# EAGLE board NFC Shield V0.9b (EAGLE 5.10)
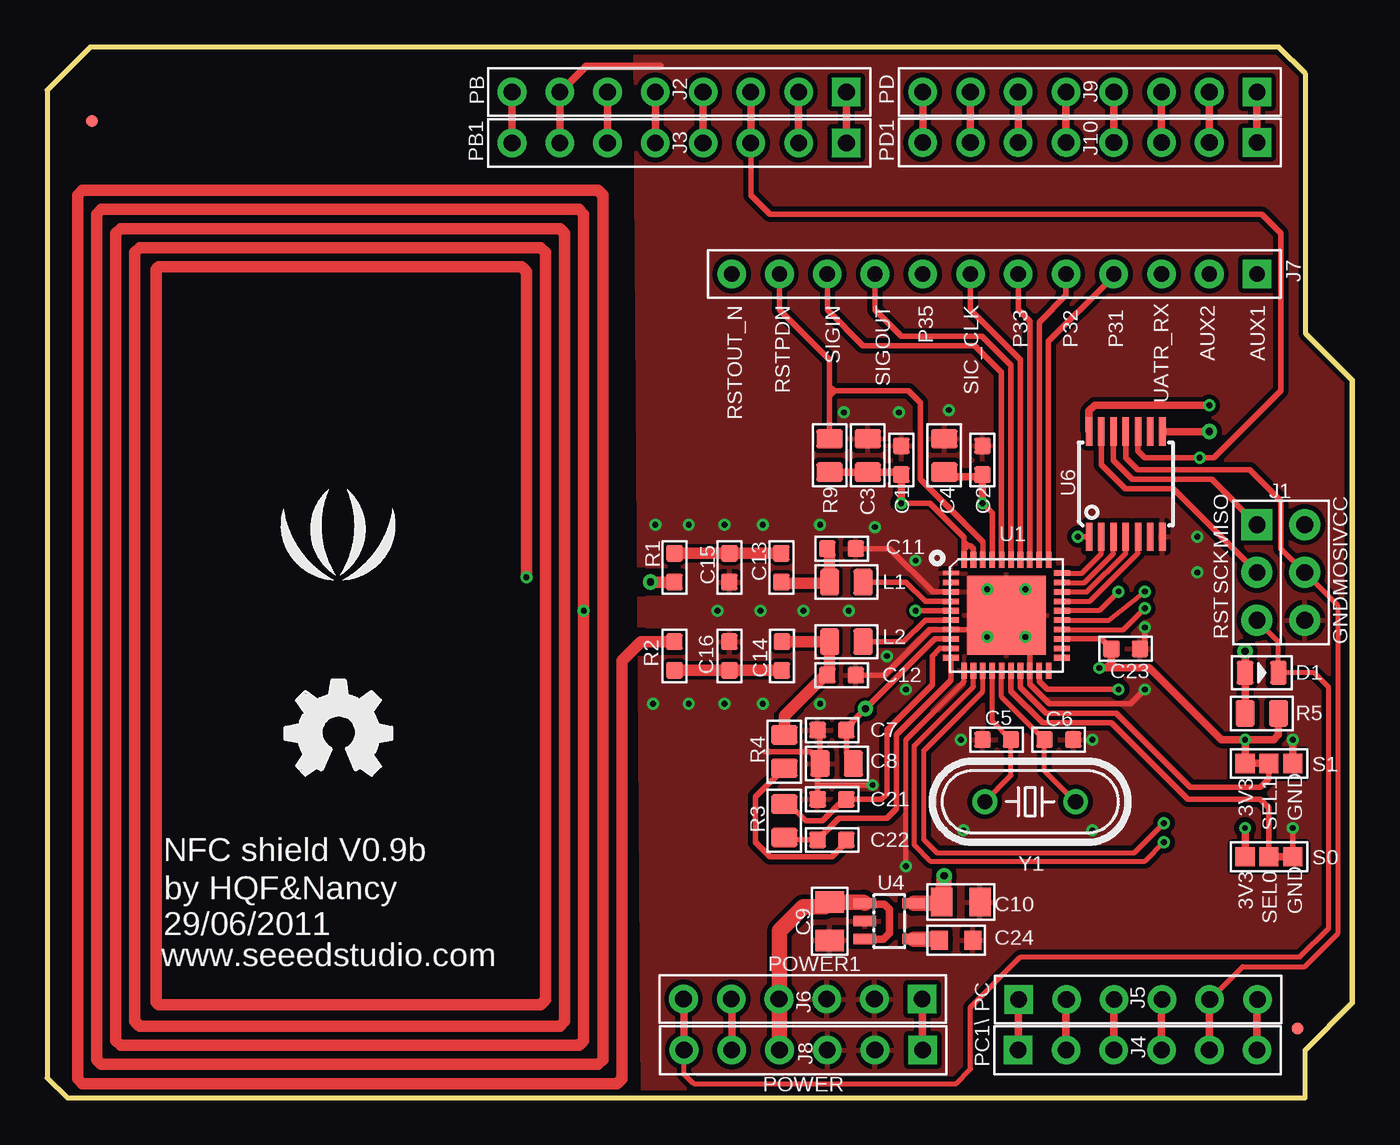
[diagram p0: board, top side]
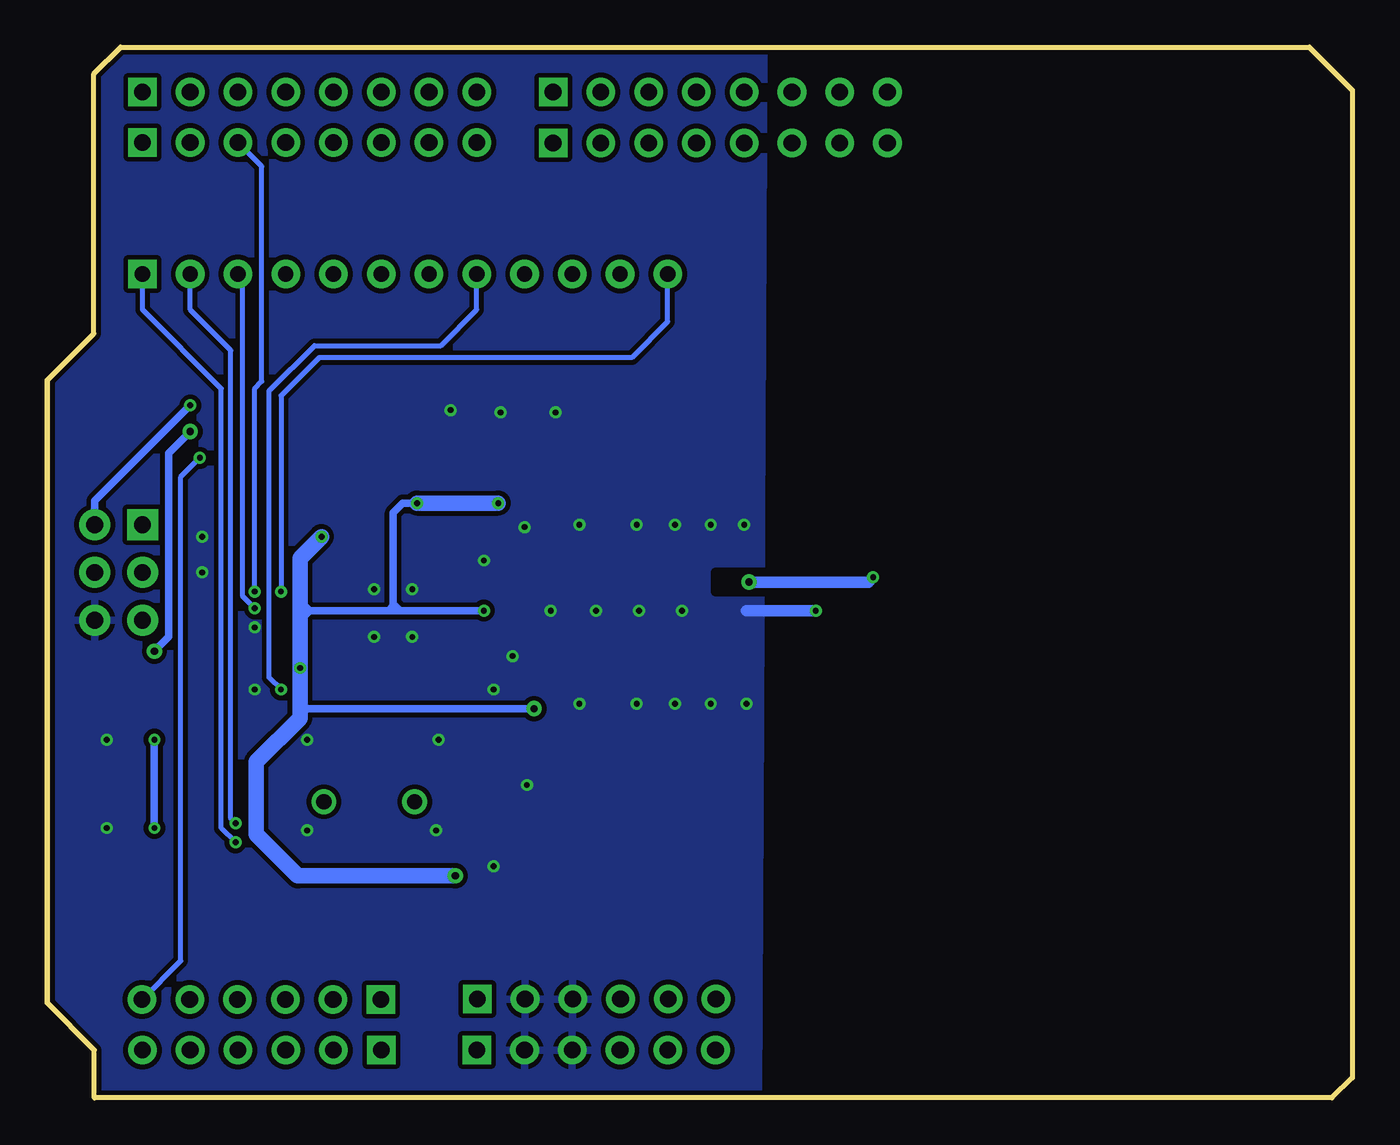
[diagram p1: board, bottom side, seen from below]

Size 69.44 x 55.88 mm. Coordinates in mm from the lower left corner, seen from the top.
Outline: 1.09,0 66.93,0 66.93,2.54 69.44,5.05 69.44,38.15 66.95,40.64 66.95,54.46 65.53,55.88 2.29,55.88 0,53.59 0,1.07 1.09,0
Copper layers (1*16): Top 0.035mm / dielectric 1.5mm / Bottom 0.035mm
Design rules "SeeedStudio_rule_no_angle_090911": minimum track width 6mil, minimum drill 12mil, track to track 6mil, track to pad 6mil, pad to pad 6mil, via to via 6mil, smd to smd 0mil, copper to edge 10mil, drill to drill 10mil, minimum pad ring 10mil, minimum via ring 6mil, stop-mask expansion 2mil, vias tented up to drill 100mil, thermal gap 10mil
Net classes: 0 default: width 0.152 mm, drill 0.305 mm, clearance 0.152 mm; 3 usbvcc: width 0.203 mm, drill 0.305 mm, clearance 0.203 mm
tRestrict: area 31.6,26.9 to 33.9,27.9; area 31.6,23.7 to 33.9,24.8; area 63,17.1 to 66.9,18.4; area 63,12.1 to 67,13.5
bRestrict: area 31.6,26.9 to 33.9,27.9

## Footprints (pad centres in the part's own frame; a part is rotated, then mirrored left to right if it is on the bottom)
0603 = smd 0.889 x 0.889: 1 -0.762,0; 2 0.762,0
0805 = smd 1.016 x 1.397: 1 -0.889,0; 2 0.889,0
0805' = smd 1.143 x 1.524: 1 -1.016,0; 2 1.016,0
0603' = smd 0.889 x 1.016: 1 -0.889,0; 2 0.889,0
D0805 = smd 0.889 x 1.27: + -0.889,0; - 0.889,0
2X3P-2.54-LEADED = drill 0.889 pad 1.651 square: 1 -1.27,2.54 | drill 0.889 pad 1.651 round: 2 -1.27,0; 3 -1.27,-2.54; 4 1.27,-2.54; 5 1.27,0; 6 1.27,2.54
CK_1X8 = drill 0.889 pad 1.524 square: 1 0,8.89 | drill 0.889 pad 1.524 round: 2 0,6.35; 3 0,3.81; 4 0,1.27; 5 0,-1.27; 6 0,-3.81; 7 0,-6.35; 8 0,-8.89
CK_1X6 = drill 0.889 pad 1.524 square: 1 0,6.35 | drill 0.889 pad 1.524 round: 2 0,3.81; 3 0,1.27; 4 0,-1.27; 5 0,-3.81; 6 0,-6.35
12P-2.54-DIP = drill 0.813 pad 1.524 square: 1 0,13.97 | drill 0.813 pad 1.524 round: 2 0,11.43; 3 0,8.89; 4 0,6.35; 5 0,3.81; 6 0,1.27; 7 0,-1.27; 8 0,-3.81; 9 0,-6.35; 10 0,-8.89; 11 0,-11.43; 12 0,-13.97
ROUND-MARK-0.635 = smd 0.635 x 0.635: P$1 0,0
JUMPER = smd 1.016 x 1.016: 00 -1.27,0; 11 1.27,0; MM 0,0
HVQFN40 = smd 0.85 x 0.25: 1 -2.95,2.25 | smd 0.85 x 0.3: 2 -2.95,1.75; 3 -2.95,1.25; 4 -2.95,0.75; 5 -2.95,0.25; 6 -2.95,-0.25; 7 -2.95,-0.75; 8 -2.95,-1.25; 9 -2.95,-1.75; 10 -2.95,-2.25; 21 2.95,-2.25; 22 2.95,-1.75; 23 2.95,-1.25; 24 2.95,-0.75; 25 2.95,-0.25; 26 2.95,0.25; 27 2.95,0.75; 28 2.95,1.25; 29 2.95,1.75; 30 2.95,2.25 | smd 0.3 x 0.85: 11 -2.25,-2.95; 12 -1.75,-2.95; 13 -1.25,-2.95; 14 -0.75,-2.95; 15 -0.25,-2.95; 16 0.25,-2.95; 17 0.75,-2.95; 18 1.25,-2.95; 19 1.75,-2.95; 20 2.25,-2.95; 31 2.25,2.95; 32 1.75,2.95; 33 1.25,2.95; 34 0.75,2.95; 35 0.25,2.95; 36 -0.25,2.95; 37 -0.75,2.95; 38 -1.25,2.95; 39 -1.75,2.95; 40 -2.25,2.95 | smd 4.2 x 4.2: 41 0,0
SOT23-5 = smd 0.55 x 1.2: 1 -0.95,-1.3; 2 0,-1.3; 3 0.95,-1.3; 4 0.95,1.3; 5 -0.95,1.3
TSSOP14 = smd 0.35 x 1.5: 1 -1.95,-2.8; 2 -1.3,-2.8; 3 -0.65,-2.8; 4 0,-2.8; 5 0.65,-2.8; 6 1.3,-2.8; 7 1.95,-2.8; 8 1.95,2.8; 9 1.3,2.8; 10 0.65,2.8; 11 0,2.8; 12 -0.65,2.8; 13 -1.3,2.8; 14 -1.95,2.8
HC49/S = drill 0.813 round: 1 -2.413,0; 2 2.413,0

## Placement (x,y rotation side)
C1  0.1uF  [0603]  45.44,33.91 270 top
C2  0.1u  [0603]  49.76,33.91 270 top
C3  10u  [0805]  43.66,34.16 270 top
C4  10u  [0805]  47.73,34.16 270 top
C5  22p  [0603]  50.52,19.05 0 top
C6  22p  [0603]  53.82,19.05 180 top
C7  0.1u  [0603]  41.76,19.56 0 top
C8  10u  [0805]  42.01,17.78 0 top
C9  10uF  [0805']  41.63,9.4 270 top
C10  10uF  [0805']  48.62,10.41 0 top
C11  220p  [0603]  42.27,29.21 180 top
C12  220p  [0603]  42.27,22.48 0 top
C13  68p  [0603]  39.07,28.19 90 top
C14  68p  [0603]  39.09,23.5 270 top
C15  100p  [0603]  36.3,28.19 90 top
C16  100p  [0603]  36.3,23.5 90 top
C21  0.1u  [0603]  41.76,15.88 0 top
C22  1nF  [0603]  41.76,13.72 0 top
C23  0.1u  [0603]  57.38,23.88 180 top
C24  100nF  [0603']  48.36,8.38 0 top
D1  1N4448WS  [D0805]  64.62,22.61 0 top
J1  HEADER-2X3P-2.54  [2X3P-2.54-LEADED]  65.63,27.94 0 top
J2  CK_1X8  [CK_1X8]  33.63,53.49 270 top
J3  CK_1X8  [CK_1X8]  33.63,50.77 270 top
J4  HEADER_1X6  [CK_1X6]  58.01,2.54 90 top
J5  HEADER_1X6  [CK_1X6]  58.04,5.23 90 top
J6  HEADER_1X6  [CK_1X6]  40.21,5.26 270 top
J7  HEADER-12P-2.54  [12P-2.54-DIP]  50.39,43.82 270 top
J8  HEADER_1X6  [CK_1X6]  40.23,2.54 270 top
J9  CK_1X8  [CK_1X8]  55.47,53.49 270 top
J10  CK_1X8  [CK_1X8]  55.47,50.8 270 top
L1  560n  [0805]  42.52,27.43 0 top
L2  560n  [0805]  42.52,24.26 0 top
LOGO1  LOGO-OSHW-FILLX0200-NT  [OSHW_FILLX200_NOTEXT]  12.67,17.15 0 top
P1  [ROUND-MARK-0.635]  2.39,51.94 0 top
P2  [ROUND-MARK-0.635]  66.52,3.68 0 top
R1  1.5  [0603]  33.38,28.19 90 top
R2  1.5  [0603]  33.38,23.5 270 top
R3  1.0k  [0805]  39.22,14.73 90 top
R4  1.6k  [0805]  39.22,18.41 90 top
R5  10k  [0805]  64.62,20.45 0 top
R9  10k  [0805]  41.63,34.16 90 top
S0  JUMPER  [JUMPER]  65,12.83 180 top
S1  JUMPER  [JUMPER]  65,17.78 180 top
U1  PN532  [HVQFN40]  51.03,25.65 0 top
U4  MIC5205_3.3  [SOT23-5]  44.81,9.4 270 top
U6  TXB0104PWR  [TSSOP14]  57.38,32.64 0 top
U$1  LOGO-SEEEDSTUDIO-SILK  [LOGO_SILK]  15.47,29.21 0 top
Y1  27.12M  [HC49/S]  52.3,15.75 0 top

## Library data of the parts
C1 C2 C5-C7 C11-C16 C21-C23 L1 L2 R1-R5 R9 = Discrete
C3 C4 C8 D1 P1 P2 Y1 = Discreter
C9 C10 S0 S1 = CPT_SMD
C24 = CPT_SMD; C0603: 100N
J1 J7 = Connector
J2-J6 J8-J10 = CONNECTER
LOGO1 U$1 = Logo
U1 = IC
U4 = ICs_v54
U6 = bibaja

## Nets
+3.3V: C1.2 C2.2 C3.2 C4.2 C7.2 C8.2 C10.1 C23.2 R5.2 R9.1 S0.11 S1.11 U1.5 U1.8 U1.23 U1.37 U1.39 U1.40 U4.5 U6.1
+5V: C9.1 J6.4 J8.4 U4.1 U4.3
AUX1: J7.1 U1.12
AUX2: J7.2 U1.13
GND: C1.1 C2.1 C3.1 C4.1 C5.1 C6.1 C7.1 C8.1 C9.2 C10.2 C11.1 C12.2 C15.1 C16.2 C21.1 C23.1 C24.2 J1.4 J2.7 J3.7 J6.2 J6.3 J8.2 J8.3 R1.1 R2.1 S0.00 S1.00 U1.1 U1.3 U1.7 U1.11 U1.18 U1.41 U4.2 U6.7
IRQ: J9.3 J10.3 U1.25
MISO: U1.29 U6.3
MISO_: J1.1 U6.12
MOSI/SDA: U1.28 U6.4
MOSI/SDA_: J1.5 J4.5 J5.5 U6.11
N$1: C5.2 U1.14 Y1.1
N$2: C6.2 U1.15 Y1.2
N$3: L2.2 U1.6
N$4: L1.2 U1.4
N$5: C11.2 C13.1 L1.1
N$6: C22.2 R4.1
N$7: C12.1 C14.1 L2.1 R4.2
N$9: C21.2 R3.2 U1.9
N$11: C22.1 R3.1 U1.10
N$13: C24.1 U4.4
P30/UATR_RX: J7.3 U1.24
P31: J7.4 U1.31
P32: J7.5 U1.32
P33: J7.6 U1.33
P34/SIC_CLK: J7.7 U1.34
P35: J7.8 U1.19
PB0: J2.1 J3.1
PB1: J2.2 J3.2
PB3/MOSI: J2.4 J3.4
PB4/MISO: J2.5 J3.5
PB5/SCK: J2.6 J3.6
PC0: J4.1 J5.1
PC1: J4.2 J5.2
PC2: J4.3 J5.3
PC3: J4.4 J5.4
PD0: J9.1 J10.1
PD1: J9.2 J10.2
PD3: J9.4 J10.4
PD4: J9.5 J10.5
PD5: J9.6 J10.6
PD6: J9.7 J10.7
PD7: J9.8 J10.8
RFTX1: C13.2 C15.2 R1.2
RFTX2: C14.2 C16.1 R2.2
RST: D1.- J1.3 J6.6 J8.6
RSTOUT_N: J7.12 U1.26
RSTPDN: J7.11 R9.2 U1.38
SCK: U1.30 U6.2
SCK_: J1.2 U6.13
SCL/RX/SS: U1.27 U6.5
SCL/RX/SS_: J2.3 J3.3 J4.6 J5.6 U6.10
SEL0: S0.MM U1.16
SEL1: S1.MM U1.17
SIGIN: J7.10 U1.36
SIGOUT: J7.9 U1.35
SPI_OE: D1.+ R5.1 U6.8
V_REF: J2.8 J3.8
VCC: J1.6 U6.14
VDD3V3: J6.5 J8.5
VDD_EXT: J6.1 J8.1

## Tracks (layer width: path | path; a pad name or v marks a point on that pad's centre or on a via)
+3.3V  (via drill 0.3 pad 0.64, 0.38 pad 0.81)
  Top 0.305: U1.5 v46.21,25.9 v46.2,25.91 | U1.23 56.09,24.4 C23.2 56.62,23.62 | U1.8 47.24,24.4 v43.54,20.7 42.52,19.69 C7.2 42.52,18.41 42.9,18.03 C8.2 | U1.37 50.28,31.1 v49.76,31.62 | 49.76,33.02 C2.2 | 48.78,29.19 U1.40 | 48.78,29.19 48.96,29.36 | 48.96,29.36 49.12,29.36 49.28,29.21 U1.39 | 48.78,29.19 48.78,29.81 46.96,31.62 v45.44,31.62 | 48.96,29.36 48.96,29.38 48.87,29.46 | 48.23,33.02 47.98,33.02 C4.2 | U6.1 v54.84,29.85
  Top 0.406: C2.2 49.63,33.15 | R9.1 C3.2 45.31,33.27 C1.2 v45.44,31.62 | 48.23,33.02 49.76,33.02 v49.76,31.62 | 63.73,17.91 S1.11 v63.73,19.05 | v63.73,14.35 S0.11 | v63.73,19.05 65.25,19.05 65.51,19.3 R5.2 | v55.98,22.86 56.36,22.86 | 56.36,22.86 56.87,22.86 | 56.87,22.86 58.65,22.86 62.46,19.05 v63.73,19.05 | 56.62,23.11 C23.2 | 56.62,23.11 56.62,22.99 | 56.36,22.86 56.62,23.11 | 56.87,22.86 56.62,23.11
  Top 0.813: U4.5 47.66,10.35 C10.1 v47.73,11.81
  Bottom 0.406: 55.47,25.91 55.6,25.91 | 55.47,25.91 51.28,25.91 | 51.28,25.91 51.03,25.91 | 51.03,25.91 50.65,25.91 | 50.65,25.91 v46.2,25.91 | 55.47,25.91 55.85,26.29 | 55.98,20.32 55.6,20.7 | 55.6,20.7 v43.54,20.7 | 55.6,20.7 55.85,20.96 | v63.73,19.05 v63.73,14.35 | v49.76,31.62 50.52,31.62 51.03,31.12 51.03,26.29 | 51.03,25.91 51.03,26.16 | 51.03,26.16 51.03,26.29 | 51.28,25.91 51.03,26.16 | 51.03,26.29 50.65,25.91 | 55.98,25.4 55.47,25.91
  Bottom 0.813: v47.73,11.81 56.11,11.81 58.3,14.01 58.3,17.87 55.98,20.19 55.98,20.32 v55.98,22.86 55.98,25.4 55.98,28.7 v54.84,29.85 | v49.76,31.62 v45.44,31.62
+5V
  Top 0.406: U4.3 44.49,8.45 44.81,8.76 44.81,10.03 44.55,10.29 43.57,10.29 U4.1
  Top 0.813: J8.4 38.96,5.23 J6.4 38.96,5.28 38.96,8.89 40.23,10.16 41.38,10.16 C9.1 43.44,10.41 U4.1
AUX1  (via drill 0.3 pad 0.64)
  Top 0.254: U1.12 49.28,21.87 46.13,18.73 46.13,13.45 46.99,12.59 58.42,12.59 v59.41,13.59
  Bottom 0.254: v59.41,13.59 60.17,14.35 60.17,37.72 64.36,41.91 J7.1
AUX2  (via drill 0.3 pad 0.64)
  Top 0.254: U1.13 49.78,21.61 46.64,18.47 46.64,13.73 47.34,13.03 57.83,13.03 v59.41,14.61
  Bottom 0.254: v59.41,14.61 59.66,14.86 59.66,39.75 61.82,41.91 J7.2
GND  (via drill 0.3 pad 0.64, 0.38 pad 0.81)
  Top 0.203: R2.1 32.74,24.26
  Top 0.254: U1.11 48.78,22.13 45.69,19.05 v45.69,12.32
  Top 0.305: U1.3 47.11,26.9 44.81,29.21 C11.1 | 49.89,24.9 U1.7 46.98,24.9 44.55,22.48 C12.2 | 49.89,24.9 50.28,24.9 U1.41 52.28,24.4 52.28,24.11 | 49.5,24.38 49.5,24.52 49.89,24.9 | 58.14,24 C23.1 58.39,24.13 v58.39,25.02 | v58.39,21.72 57.63,20.96 53.31,20.96 52.28,21.99 U1.18 52.28,24.11 | 52.28,24.11 52.55,24.38 | C21.1 41,16.64 | 41,16.64 41,17.65 C8.1 41.12,17.91 | 41.12,17.91 41.12,19.43 C7.1 | 41,16.64 v43.92,16.64 | 41.12,17.91 40.61,18.41 38.2,18.41 | 65,12.83 65,12.8 | 66.27,12.8 S0.00 v66.27,14.35
  Top 0.406: J3.7 J2.7 27.3,53.49 28.68,54.86 32.61,54.86 | S1.00 v66.27,19.05 | 65,12.83 S0.00
  Top 0.61: R2.1 31.6,24.26 30.58,23.24 30.58,1.02 30.33,0.76 1.88,0.76 1.63,1.02 1.63,48.01 1.88,48.26 29.31,48.26 29.57,48.01 29.57,2.03 29.31,1.78 2.9,1.78 2.64,2.03 2.64,46.99 2.9,47.24 28.3,47.24 28.55,46.99 v28.55,25.91 28.55,3.05 28.3,2.79 3.91,2.79 3.66,3.05 3.66,45.97 3.91,46.23 27.28,46.23 27.53,45.97 27.53,4.06 27.28,3.81 4.93,3.81 4.67,4.06 4.67,44.96 4.93,45.21 26.26,45.21 26.52,44.96 26.52,5.21 26.26,4.95 5.94,4.95 5.82,5.08 5.82,44.07 5.94,44.2 25.25,44.2 25.5,43.94 v25.5,27.69 | v32.11,27.43 R1.1
  Bottom 0.61: v32.11,27.43 25.76,27.43 v25.5,27.69 | v28.55,25.91 32.23,25.91
  other vias: 48.62,19.05 55.6,19.05 48.74,14.22 55.6,14.22 45.69,21.72 42.65,25.91 32.23,20.96 44.04,30.35 46.2,28.57 42.39,36.45 45.31,36.45 47.98,36.58 44.68,23.5 50.01,27.05 52.04,27.05 50.01,24.51 52.04,24.51 34.14,20.96 36.04,20.96 38.07,20.96 41.12,20.96 40.23,25.91 37.95,25.91 35.66,25.91 32.36,30.48 34.14,30.48 36.04,30.48 38.07,30.48 41.12,30.48 61.19,29.85 61.19,27.94
  pour Bottom (isolate 0.254): 31.29,56.01 31.6,0 66.9,0 66.9,2.54 69.44,5.08 69.44,38.1 66.9,40.64 66.83,54.69 65.56,55.96
  pour Top (isolate 0.183): 31.98,31.24 48.87,31.24 49.12,30.99 49.12,20.57 32.23,20.57 31.98,20.83
  pour Top (isolate 0.254, rank 2): 31.34,56.01 65.61,55.96 66.88,54.69 66.9,40.64 69.44,38.1 69.44,5.08 66.9,2.54 66.9,0 31.72,0
IRQ  (via drill 0.3 pad 0.64)
  Top 0.254: U1.25 56.49,25.4 v58.39,26.92
  Top 0.406: J10.3 J9.3
  Bottom 0.254: v58.39,26.92 58.39,37.72 58.01,38.1 58.01,49.53 J10.3
MISO
  Top 0.254: U6.3 56.73,28.94 55.19,27.4 U1.29
MISO_
  Top 0.305: U6.12 56.73,33.9 57.73,32.89 61.95,32.89 J1.1
MOSI/SDA
  Top 0.254: U6.4 57.38,28.96 55.33,26.9 U1.28 54,26.92
MOSI/SDA_
  Top 0.254: 61.82,5.26 J5.5 63.6,6.98 66.9,6.98 68.68,8.76 68.68,26.16 J1.5
  Top 0.305: U6.11 57.38,34.04 58.01,33.4 63.98,33.4 65.63,31.75 65.63,29.21 J1.5
  Top 0.406: J4.5 61.82,5.21 J5.5
N$1
  Top 0.254: U1.14 50.28,20.05 C5.2 51.28,17.15 Y1.1
N$2
  Top 0.254: Y1.2 53.06,17.4 C6.2 52.04,20.07 50.78,21.33 U1.15
N$3
  Top 0.305: U1.6 46.71,25.4 45.57,24.26 L2.2
N$4
  Top 0.305: U1.4 46.72,26.4 45.69,27.43 L1.2
N$5
  Top 0.61: C11.2 41.63,29.08 L1.1 41.63,27.3 41.58,27.36 39.14,27.36 C13.1
N$6
  Top 0.305: C22.2 42.52,13.59 41.76,12.83 38.46,12.83 37.69,13.59 37.69,16 R4.1
N$7
  Top 0.61: C14.1 L2.1 41.63,22.61 C12.1 41.38,22.48 39.22,20.32 R4.2
N$9
  Top 0.305: U1.9 47.5,23.9 47.09,23.5 47.09,21.97 44.68,19.56 44.68,16.16 44.39,15.88 C21.2 42.39,15.88 41.25,14.73 40.36,14.73 39.47,15.62 R3.2
N$11
  Top 0.305: U1.10 48.08,22.2 45.19,19.3 45.19,15.37 44.68,14.86 42.14,14.86 C22.1 39.34,13.72 R3.1
N$13
  Top 0.813: U4.4 47.53,8.45 C24.1
P30/UATR_RX  (via drill 0.3 pad 0.64)
  Top 0.254: U1.24 57.26,24.9 v58.39,26.04
  Bottom 0.254: v58.39,26.04 59.03,26.67 59.03,43.56 J7.3
P31
  Top 0.305: U1.31 53.28,40.22 56.49,43.43 56.49,43.56 J7.4
P32
  Top 0.305: U1.32 52.78,41.25 54.2,42.67 J7.5
P33
  Top 0.305: U1.33 52.28,41.3 51.66,41.91 J7.6
P34/SIC_CLK
  Top 0.305: U1.34 51.78,39.26 49.12,41.91 J7.7
P35  (via drill 0.3 pad 0.64)
  Top 0.305: U1.19 52.78,22.15 53.21,21.72 v57,21.72
  Bottom 0.254: v57,21.72 57.63,22.35 57.63,37.59 55.22,40.01 48.49,40.01 46.58,41.91 J7.8
PB0
  Top 0.406: J3.1 J2.1
PB1
  Top 0.406: J3.2 J2.2
PB3/MOSI
  Top 0.406: J3.4 J2.4
PB4/MISO
  Top 0.406: J3.5 J2.5
PB5/SCK
  Top 0.406: J3.6 J2.6
PC0
  Top 0.406: J4.1 51.66,5.21 J5.1
PC1
  Top 0.406: J4.2 54.2,5.21 J5.2
PC2
  Top 0.406: J4.3 56.74,5.21 J5.3
PC3
  Top 0.406: J4.4 59.28,5.21 J5.4
PD0
  Top 0.406: J10.1 J9.1
PD1
  Top 0.406: J10.2 J9.2
PD3
  Top 0.406: J10.4 J9.4
PD4
  Top 0.406: J10.5 J9.5
PD5
  Top 0.406: J10.6 J9.6
PD6
  Top 0.406: J10.7 J9.7
PD7
  Top 0.406: J10.8 J9.8
RFTX1
  Top 0.61: R1.2 36.17,28.96 C15.2 C13.2
RFTX2
  Top 0.61: C14.2 C16.1 R2.2
RST
  Top 0.254: J8.6 33.88,1.27 34.39,0.76 48.36,0.76 49.12,1.52 49.12,4.83 51.79,7.49 66.65,7.49 68.17,9.02 68.17,21.84 67.41,22.61 D1.- 65.51,24.26 J1.3
  Top 0.406: J8.6 33.88,5.23 J6.6
RSTOUT_N  (via drill 0.3 pad 0.64)
  Top 0.254: U1.26 55.98,25.9 v57,26.92
  Bottom 0.254: v57,26.92 57,37.34 54.97,39.37 38.33,39.37 36.42,41.27 J7.12
RSTPDN
  Top 0.305: U1.38 49.78,29.57 46.46,32.89 46.46,36.96 45.82,37.59 41.88,37.59 | 41.63,37.34 R9.2 | 41.63,37.34 41.63,37.85 | 41.63,37.85 41.63,39.24 38.96,41.91 J7.11 | 41.88,37.59 41.63,37.34 | 41.88,37.59 41.63,37.85
SCK
  Top 0.254: U6.2 56.08,28.93 55.06,27.9 U1.30
SCK_
  Top 0.305: U6.13 56.08,33.68 57.37,32.38 59.92,32.38 J1.2
SCL/RX/SS
  Top 0.254: U6.5 58.03,28.97 55.46,26.4 U1.27
SCL/RX/SS_  (via drill 0.3 pad 0.64)
  Top 0.305: U6.10 58.01,35.42 58.01,34.42 58.39,34.04 v61.32,34.04 62.08,34.04 65.63,37.59 65.63,45.97 64.62,46.99 38.46,46.99 37.44,48.01 37.44,50.93
  Top 0.406: J4.6 64.36,5.21 J5.6 | J3.3 37.44,50.93 J2.3
  Bottom 0.254: v61.32,34.04 62.33,33.02 62.33,7.29 J5.6
SEL0
  Top 0.305: U1.16 51.28,21.63 52.97,19.94 56.62,19.94 60.68,15.88 64.54,15.88 65,15.42 S0.MM
SEL1
  Top 0.305: U1.17 51.78,21.83 53.16,20.45 56.87,20.45 60.81,16.51 64.54,16.51 65,16.97 S1.MM | 63.7,17.8 63.7,17.78
  Top 0.406: 63.7,17.8 65,17.8 S1.MM
SIGIN
  Top 0.305: U1.36 50.78,38.59 49.36,40.01 43.41,40.01 41.5,41.91 J7.10
SIGOUT
  Top 0.305: U1.35 51.28,38.95 49.72,40.51 45.44,40.51 44.04,41.91 J7.9
SPI_OE  (via drill 0.38 pad 0.81)
  Top 0.406: R5.1 D1.+ v63.73,23.75 | v61.82,35.43 59.33,35.43 U6.8
  Bottom 0.406: v63.73,23.75 62.97,24.51 62.97,34.29 v61.82,35.43
V_REF
  Top 0.406: J3.8 J2.8
VCC  (via drill 0.3 pad 0.64)
  Top 0.406: U6.14 55.43,36.53 55.73,36.83 v61.82,36.83
  Bottom 0.406: v61.82,36.83 66.9,31.75 J1.6
VDD3V3
  Top 0.406: J8.5 36.42,5.23 J6.5
VDD_EXT
  Top 0.406: J6.1 46.56,2.57 J8.1

## Text on the board
tPlace: PB | PD | PB1 | PD1 | RSTOUT_N | RSTPDN | SIGIN | SIGOUT | P35 | SIC_CLK | AUX2 | AUX1 | P33 | P32 | P31 | UATR_RX | MISO | VCC | SCK | MOSI | RST | GND | 3V3 | SEL1 | GND | NFC shield V0.9b | 3V3 | SEL0 | by HQF&Nancy | GND | 29/06/2011 | www.seeedstudio.com | POWER1 | PC | POWER | PC1\